# Altium PCB PCB1.PcbDoc
Units mil, origin at the board's own origin, x right, y up, seen from the top; angles counter-clockwise.
Board outline 1650 x 725 mil, 2 copper layers (Top Layer, Bottom Layer); 8 components, 7 nets, 18 pads, 0 vias.
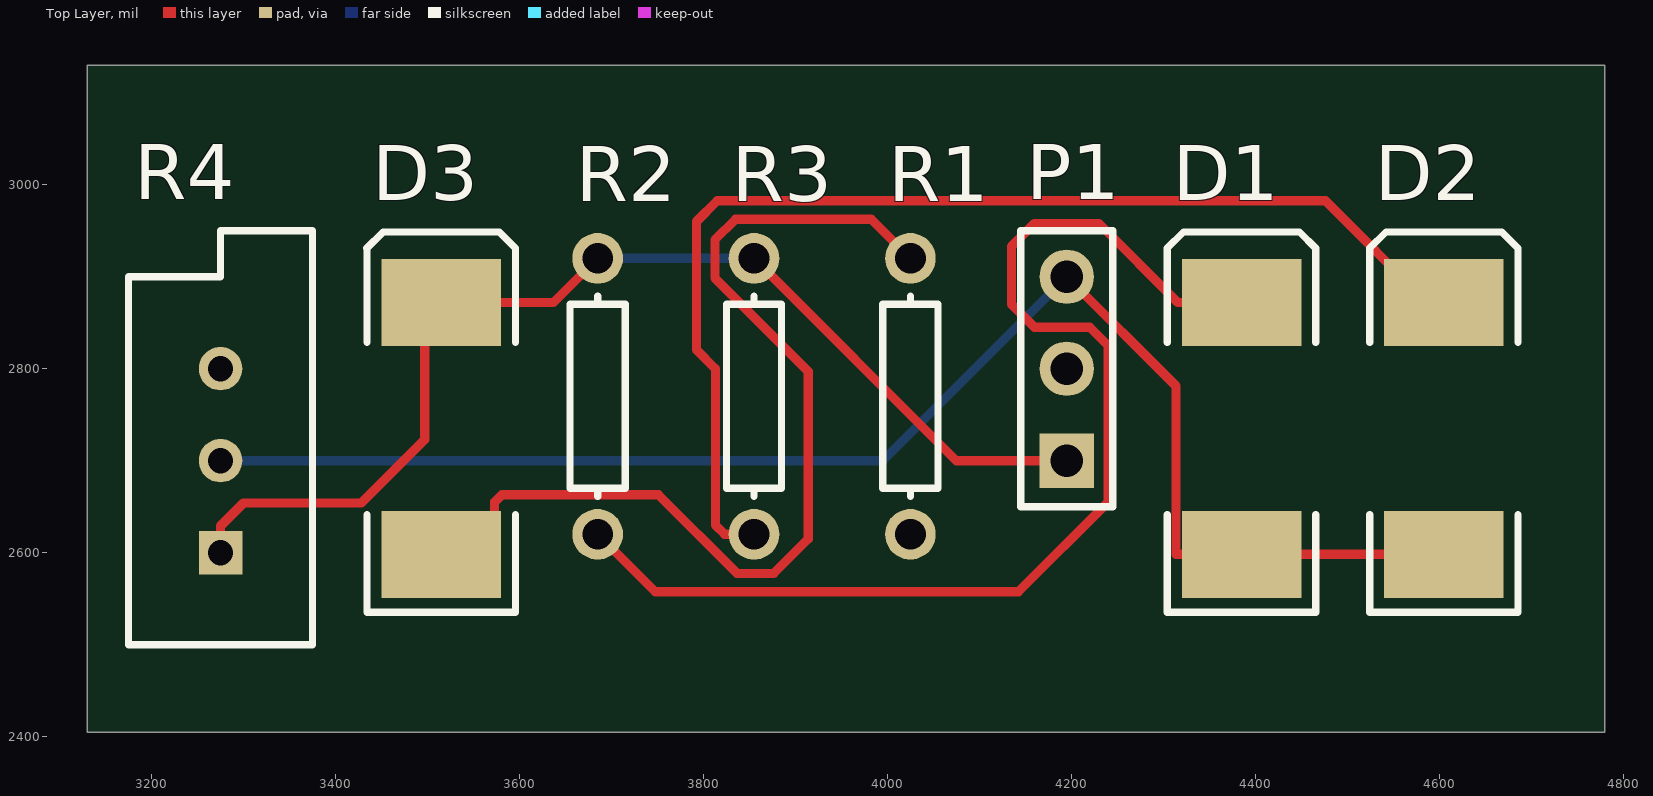
[diagram p0: Top Layer view]
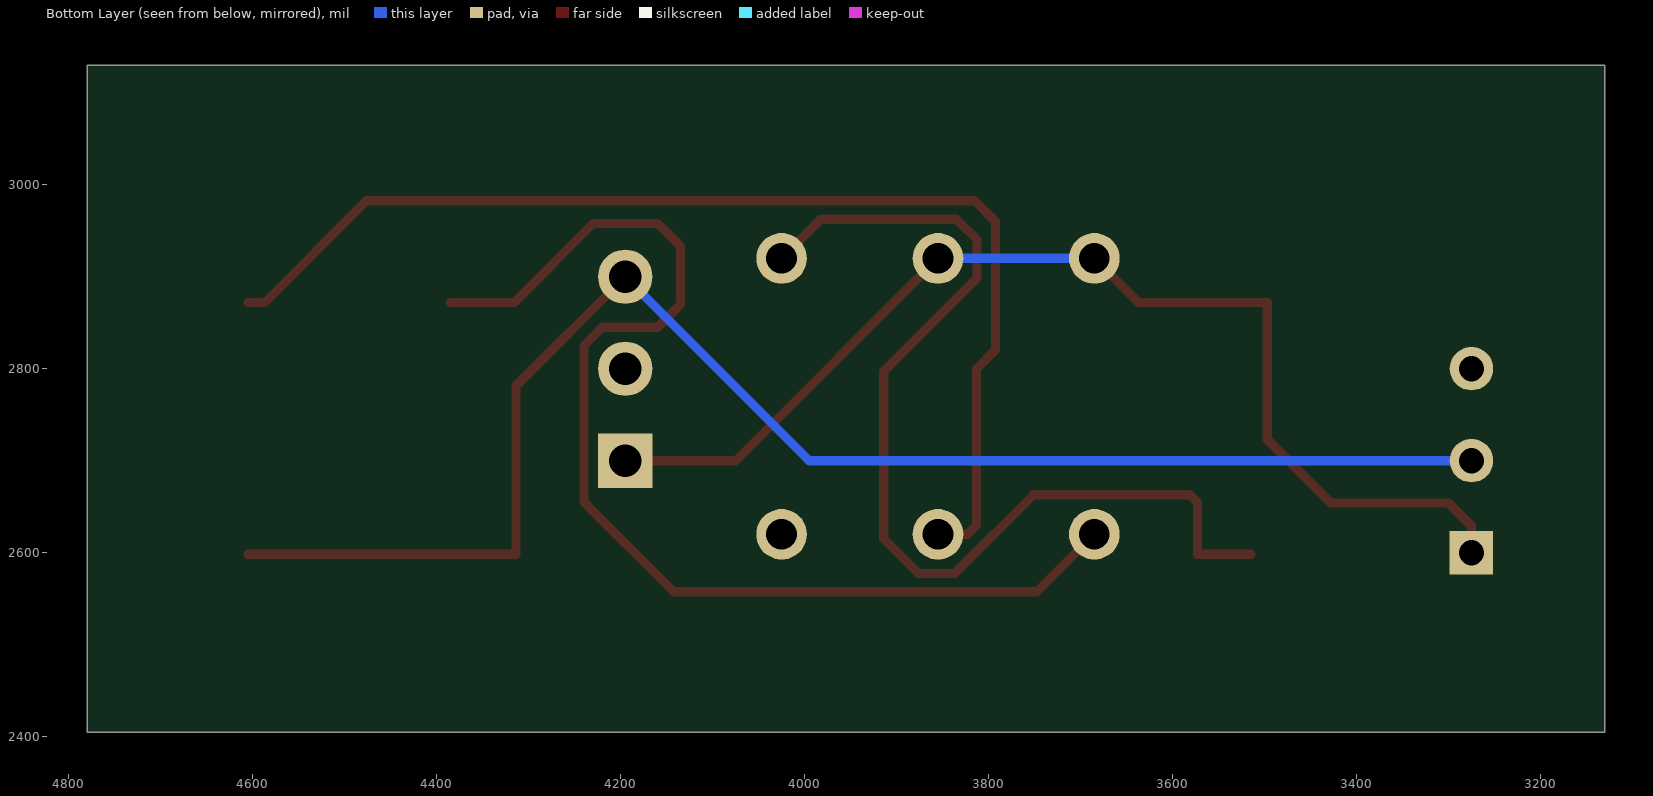
[diagram p1: Bottom Layer view, seen from below]

## Layer stack, top to bottom
Top Solder: solder mask 0.4, Solder Resist, Dk 3.5
Top Layer: signal copper 1.4
Dielectric 1: dielectric 12.6, FR-4, Dk 4.8
Bottom Layer: signal copper 1.4
Bottom Solder: solder mask 0.4, Solder Resist, Dk 3.5

## Board outline
3130,2405 4780,2405 4780,3130 3130,3130

## Design rules (kind name [scope] priority, off if disabled: settings)
Clearance [All] p1: gap=10 ignorepadtopadclearanceinfootprint=FALSE except(0: Arc-Hole Track-Hole SMDPad-Hole THPad-Hole Via-Hole Fill-Hole Poly-Hole Region-Hole Text-Hole)
PolygonConnect [All] p1: connectstyle=Relief reliefconductorwidth=10 reliefentries=4 polygonreliefangle="90 Angle" airgapwidth=10
RoutingVias [All] p1: holewidth=28 width=50 viastyle="Through Hole" minholewidth=28 minwidth=50 maxholewidth=28 maxwidth=50
SolderMaskExpansion [All] p1: expansion=4 istentingtop=FALSE
Width [All] p1: maxlimit=10 minlimit=10 preferedwidth=10
30 further rules are at their usual default settings.

## Components (designator, comment, footprint, x,y, rotation, side; value= is the part's Value field where it differs from the comment)
D1 "Diode" SMC 4385,2735 r90 top
D2 "Diode" SMC 4605,2735 r90 top
D3 "Diode" SMC 3515,2735 r90 top
P1 "Header 3" HDR1X3 4195,2700 r90 top
R1 "Res1" AXIAL-0.3 4025,2770 r90 top value=1K
R2 "Res1" AXIAL-0.3 3685,2770 r90 top value=1K
R3 "Res1" AXIAL-0.3 3855,2770 r90 top value=1K
R4 "RPot" VR5 3275,2700 r90 top value=1K

## Footprints (in the part's own frame and the unit in brackets; to place one, negate y for a bottom-side part, rotate by r counter-clockwise, add the part's x,y. Pads: shape width x height; smd on the part's side, far side on the other; paste and mask are expansions set on the pad)
AXIAL-0.3 [mm] "Axial Device, Thru-Hole; 2 Leads; 0.3 in Pin Spacing"
  round 1.4 hole 0.85: 1(-3.81,0) 2(3.81,0)
  silkscreen extent -2.77,-0.76 2.77,0.76
HDR1X3 [mm] "Connector; Header; 3 Position"
  rect 1.5x1.5 hole 0.9: 1(0,0)
  round 1.5 hole 0.9: 2(2.54,0) 3(5.08,0)
  silkscreen extent -1.27,-1.27 6.35,1.27
SMC [mm] "DO-214-AB/SMC; 2 C-Bend Leads; Body 7.9 x 5.9 mm, inc. leads (LxW)"
  rect 2.4x3.3 smd: 1(-3.475,0) 2(3.475,0)
  silkscreen extent -5.08,-2.05 5.42,2.06
VR5 [mm] "Thru-Hole; 3 Leads"
  rect 1.2x1.2 hole 0.7: 1(-2.54,0)
  round 1.2 hole 0.7: 2(0,0) 3(2.54,0)
  silkscreen extent -5.08,-2.54 6.35,2.54

## Part data
D1 D2 D3: "Default Diode", Code_JEDEC=DO-214-AB, LatestRevisionDate=17-Jul-2002, LatestRevisionNote="Re-released for DXP Platform.", PackageDescription="DO-214-AB/SMC; 2 C-Bend Leads; Body 7.9 x 5.9 mm, inc. leads (LxW)", PackageReference=SMC, PackageVersion=Sep-1996, Published=8-Jun-2000, Publisher="Altium Limited"
P1: "Header, 3-Pin", LatestRevisionDate=17-Jul-2002, LatestRevisionNote="Re-released for DXP Platform.", Publisher="Altium Limited"
R1 R2 R3: "Resistor", LatestRevisionDate=17-Jul-2002, LatestRevisionNote="Re-released for DXP Platform.", PackageDescription="Axial Device, Thru-Hole; 2 Leads; 0.3 in Pin Spacing", PackageReference=AXIAL-0.3, Published=8-Jun-2000, Publisher="Altium Limited"
R4: "Potentiometer", LatestRevisionDate=17-Jul-2002, LatestRevisionNote="Re-released for DXP Platform.", PackageDescription="Variable Resistor, Thru-Hole; 3 Leads", PackageReference=VR5, Published=8-Jun-2000, Publisher="Altium Limited", Set Position=0.5, Sim Note="Enter the Resistance value and the set point into parameter fields."

## Nets (pads, with @x,y where several pads share a name; then routed paths per layer and width w, separated by ;. In a path a pad name is that pad's centre, name@x,y a point inside that pad or via, vN(x,y) a via of type N, cw(c..) or ccw(c..) an arc to the next point about the centre after c; other vN are vias at no path point)
+5: D1.1 D2.1 P1.3 R4.2 | length 1645.1
  Top Layer w10: P1.3 4313.81,2781.19 4313.81,2598.19 D1.1 D2.1
  Bottom Layer w10: R4.2 3995,2700 P1.3
GND: D3.2 P1.1 R2.2 R3.2 R4.1 | length 1247.8
  Top Layer w10: R4.1 3275,2629 3300,2654 3428,2654 3497,2723 3497,2871.81 D3.2 3636.81,2871.81 R2.2 ; R3.2 4075,2700 P1.1
  Bottom Layer w10: R2.2 R3.2
NetD1_2: D1.2 R2.1 | length 1274
  Top Layer w10: R2.1 3747.56,2557.44 4142.44,2557.44 4240,2655 4240,2825 4220,2845 4160,2845 4135,2870 4135,2933 4160,2958 4229.81,2958 4316,2871.81 D1.2
NetD2_2: D2.2 R3.1 | length 1252.4
  Top Layer w10: R3.1 3823,2620 3813,2630 3813,2800 3792.44,2820.56 3792.44,2960 3815,2982.56 4476.25,2982.56 4587,2871.81 D2.2
NetD3_1: D3.1 R1.2 | length 1116.7
  Top Layer w10: D3.1 3573,2598.19 3573,2655 3581,2663 3751,2663 3836.56,2577.44 3876.44,2577.44 3914,2615 3914,2797 3812.44,2898.56 3812.44,2940 3835,2962.56 3982.44,2962.56 R1.2
NetR1_1: R1.1
NetR4_3: R4.3
pads on no net: P1.2